# EAGLE board pcb_sensor (EAGLE 9.6.2)
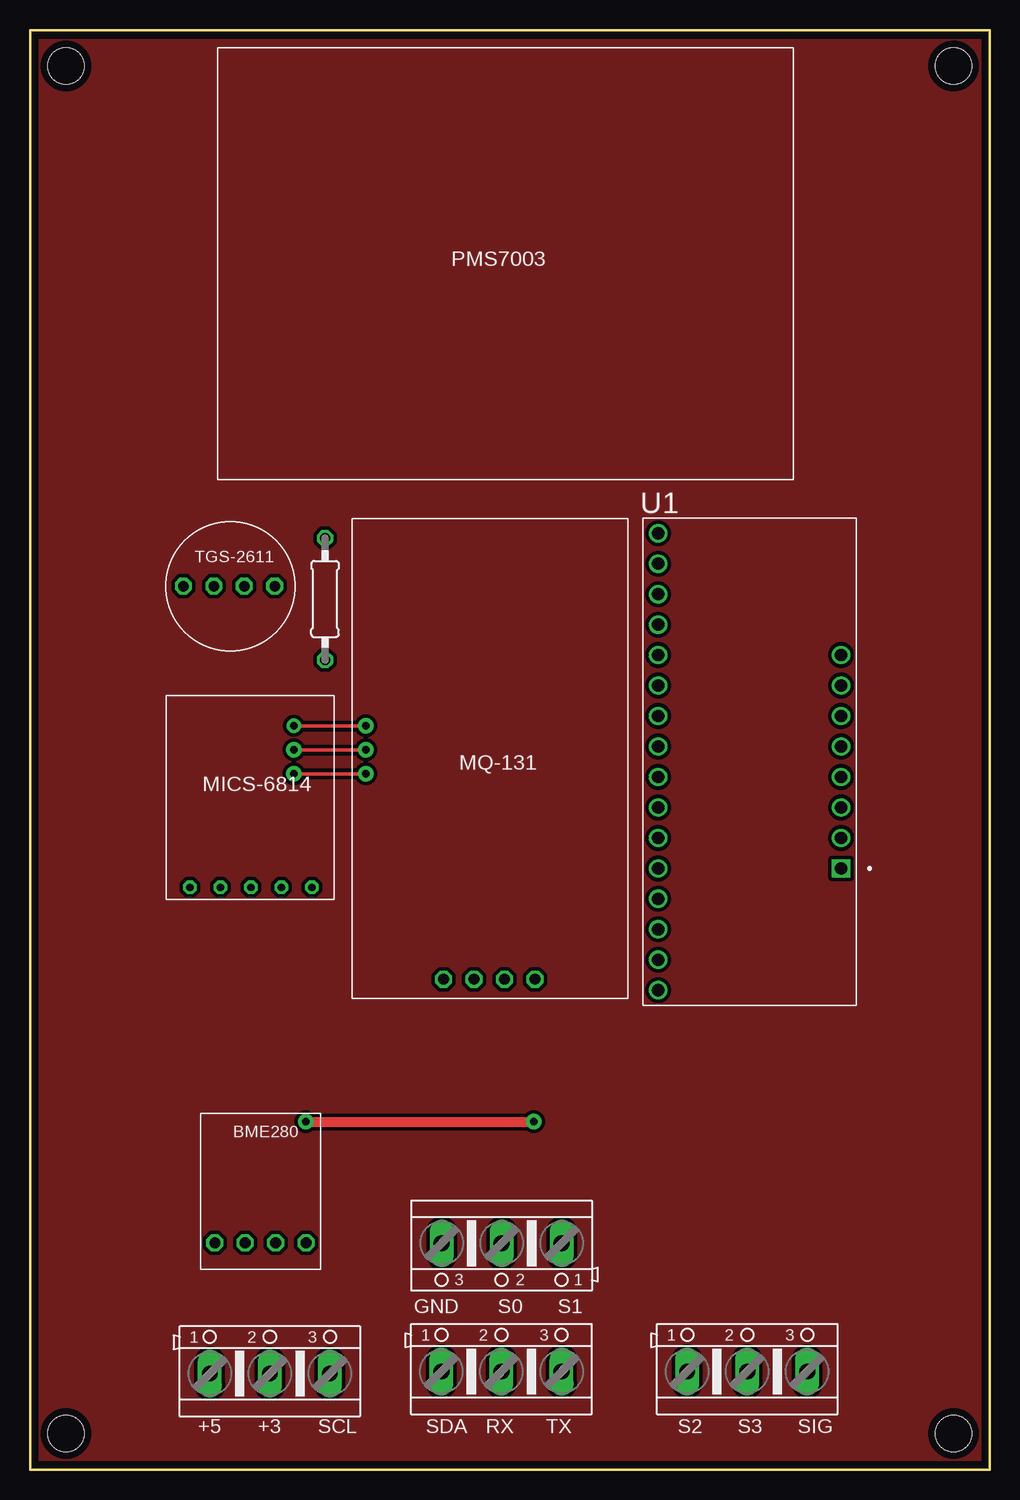
[diagram p0: board, top side]
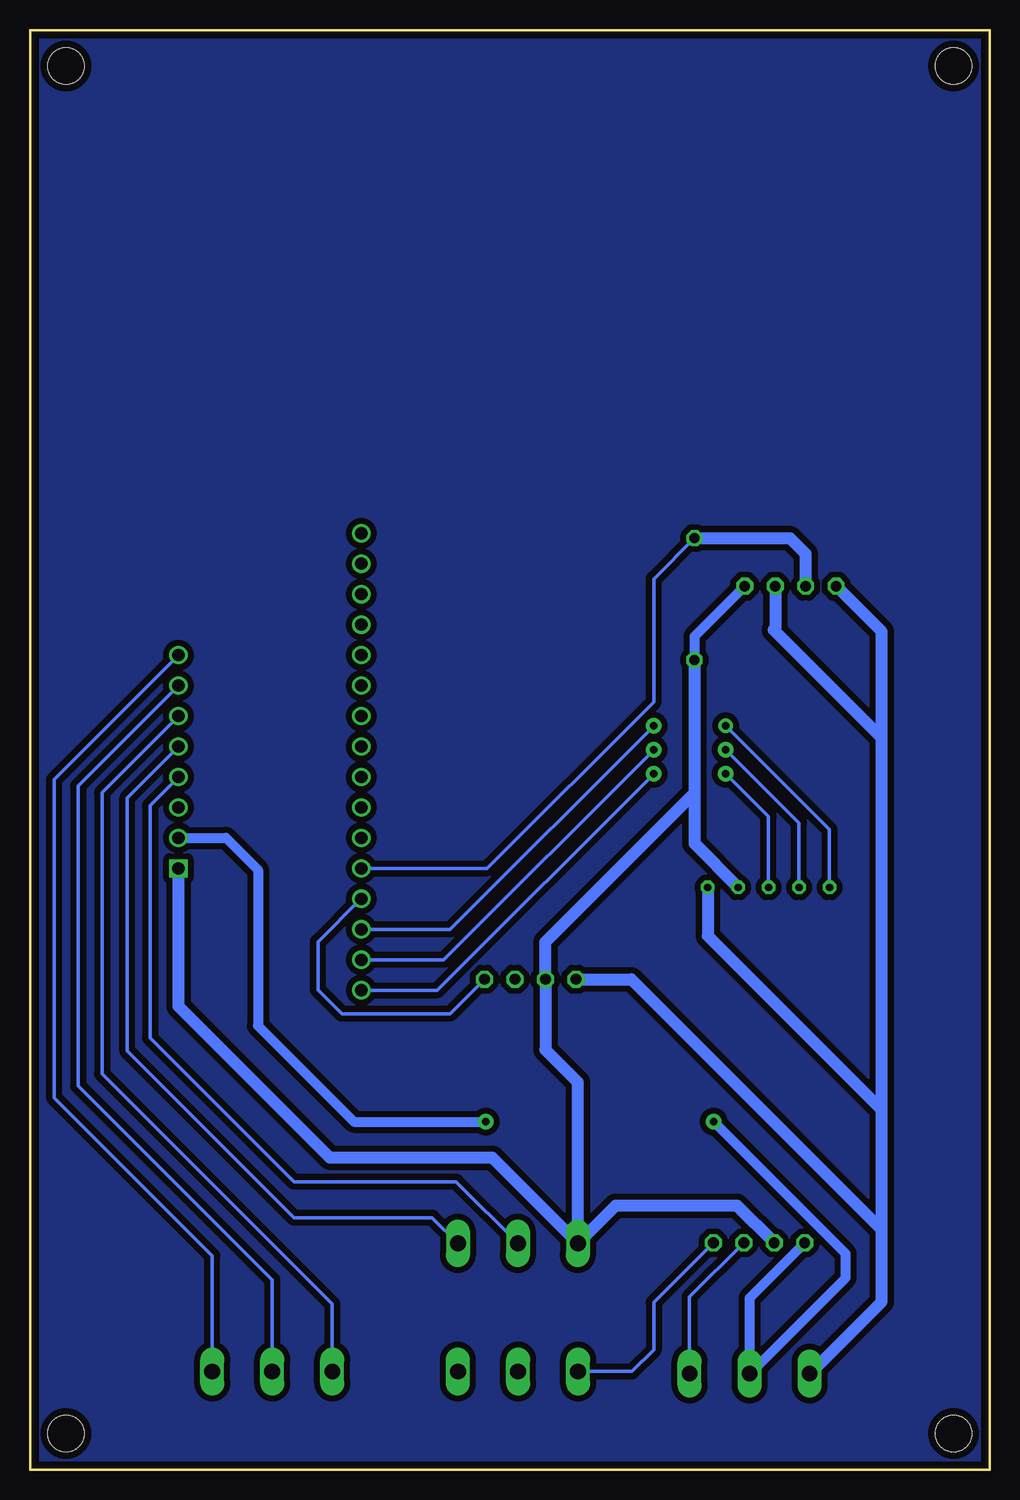
[diagram p1: board, bottom side, seen from below]

Size 80 x 120 mm. Coordinates in mm from the lower left corner, seen from the top.
Outline: 0,120 80,120 80,0 0,0 0,120
Copper layers (1*16): Top 0.035mm / dielectric 1.5mm / Bottom 0.035mm
Design rules "default *": minimum track width 6mil, minimum drill 0.35mm, track to track 12mil, track to pad 12mil, pad to pad 12mil, via to via 12mil, smd to smd 12mil, copper to edge 24mil, drill to drill 6mil, minimum pad ring 10mil, minimum via ring 8mil, stop-mask expansion 4mil, vias tented up to drill 0mil, thermal gap 10mil
Holes 3 mm at 3,3 77,3 77,117 3,117

## Footprints (pad centres in the part's own frame; a part is rotated, then mirrored left to right if it is on the bottom)
0207/10 = drill 0.813 octagon: 1 -5.08,0; 2 5.08,0
MODULE_BOB-09056 = drill 1.02: JP1-1 -7.62,-19.05; JP1-2 -7.62,-16.51; JP1-3 -7.62,-13.97; JP1-4 -7.62,-11.43; JP1-5 -7.62,-8.89; JP1-6 -7.62,-6.35; JP1-7 -7.62,-3.81; JP1-8 -7.62,-1.27; JP1-9 -7.62,1.27; JP1-10 -7.62,3.81; JP1-11 -7.62,6.35; JP1-12 -7.62,8.89; JP1-13 -7.62,11.43; JP1-14 -7.62,13.97; JP1-15 -7.62,16.51; JP1-16 -7.62,19.05; JP3-2 7.62,-6.35; JP3-3 7.62,-3.81; JP3-4 7.62,-1.27; JP3-5 7.62,1.27; JP3-6 7.62,3.81; JP3-7 7.62,6.35; JP3-8 7.62,8.89 | drill 1.02 square: JP3-1 7.62,-8.89
BME280 = drill 0.9 octagon: GND 2.54,0; SCL 5.08,0; SDA 7.62,0; VIN 0,0
MICS-6814 = drill 0.6 octagon: 5V 10.16,0; CO 0,0; GND 7.62,0; NH3 2.54,0; NO2 5.08,0
MQ-131 = drill 0.9 octagon: A0 15.26,1.6; D0 12.72,1.6; GND 10.18,1.6; VCC 7.64,1.6
TGS-2611 = drill 0.9 octagon: 1 8.7,4; 2 3.62,4; 3 1.08,4; 4 6.16,4
AK500/3 = drill 1.321 long: 1 -5.004,0; 2 0,0; 3 5.004,0

## Placement (x,y rotation side)
R1  10k  [0207/10]  24.6,72.56 270 top
U1  BOB-09056  [MODULE_BOB-09056]  60,59 0 top
U$1  BME280  [BME280]  15.41,18.9 0 top
U$2  MICS-6814  [MICS-6814]  13.34,48.53 0 top
U$3  MQ-131MQ-131  [MQ-131]  26.85,39.27 0 top
U$4  TGS-2611  [TGS-2611]  11.71,69.63 0 top
U$5  PMS7003  [PMS7003]  23.66,82.53 0 top
X1  [AK500/3]  20,8 0 top
X2  [AK500/3]  39.31,8.17 0 top
X3  [AK500/3]  59.8,8.17 0 top
X4  [AK500/3]  39.32,18.86 180 top

## Library data of the parts
R1 = rcl; SPICEPREFIX: R
U1 = Multiplexer; AVAILABILITY: In Stock; CHECK_PRICES: https://www.snapeda.com/parts/BOB-09056/SparkFun/view-part/?ref=eda; DESCRIPTION: 74HC4067 - Analog and Digital Switch Interface Evaluation Board; MF: SparkFun Electronics; MP: BOB-09056; PACKAGE: None; PRICE: None; SNAPEDA_LINK: https://www.snapeda.com/parts/BOB-09056/SparkFun/view-part/?ref=snap
U$1-U$5 = Sensor_Manual
X1-X4 = con-ptr500; OC_FARNELL: unknown; OC_NEWARK: unknown

## Nets
N$1: U1.JP1-1 U$2.NO2
N$2: R1.2 U1.JP3-1 U$1.GND U$2.GND U$3.GND U$4.1 X4.3
N$3: R1.1 U1.JP1-5 U$4.2
N$5: U1.JP1-3 U$2.CO
N$6: U1.JP1-2 U$2.NH3
N$7: U$1.SDA X2.1
N$8: U1.JP3-5 X4.1
N$9: U$2.5V U$3.VCC U$4.3 U$4.4 X1.1
N$10: U1.JP1-4 U$3.A0
N$11: U$1.SCL X1.3
N$12: U1.JP3-8 X3.3
N$13: U1.JP3-4 X4.2
N$14: U1.JP3-7 X3.2
N$15: U1.JP3-6 X3.1
N$16: U1.JP3-2 U$1.VIN X1.2

## Tracks (layer width: path | path; a pad name or v marks a point on that pad's centre or on a via)
GND
  pour Top: 0,120 80,120 80,0 0,0
  pour Bottom (isolate 0.508): 0,120 80,120 80,0 0,0
N$1  (via drill 0.61 pad 1.27)
  Top 0.305: v28,58 v22,58
  Bottom 0.305: U$2.NO2 18.42,54.42 v22,58 | U1.JP1-1 46.05,39.95 v28,58
N$2
  Bottom 0.813: U$4.1 24.6,69.44 R1.2
  Bottom 1.016: U$1.GND 21.05,22 31.18,22 X4.3 | R1.2 24.6,56.4 | 24.6,56.4 24.6,52.17 U$2.GND | 24.6,56.4 37.03,43.97 U$3.GND 37.03,35 34.32,32.29 X4.3 | U1.JP3-1 67.62,38.62 55,26 41.46,26 X4.3
N$3
  Bottom 0.305: U1.JP1-5 41.89,50.11 28,64 28,74.24 R1.1
  Bottom 1.016: U$4.2 15.33,76.33 16.64,77.64 R1.1
N$5  (via drill 0.61 pad 1.2, 0.61 pad 1.27)
  Top 0.305: v22,62 v28,62
  Bottom 0.305: U$2.CO 13.34,53.34 v22,62 | v28,62 44.97,45.03 U1.JP1-3
N$6  (via drill 0.61 pad 1.27)
  Top 0.305: v22,60 v28,60
  Bottom 0.305: U$2.NH3 15.88,53.88 v22,60 | U1.JP1-2 45.51,42.49 v28,60
N$7
  Bottom 0.305: X2.1 29.83,8.17 28,10 28,13.93 U$1.SDA
N$8
  Bottom 0.305: U1.JP3-5 71.89,56 71.89,34.89 58,21 46.46,21 X4.1
N$9
  Bottom 1.016: X1.1 9,14 9,20 | U$4.3 9,69.84 9,61 | 9,20 9,30 | 9,30 9,61 | U$4.4 17.87,70.13 18,70 9,61 | 9,20 18,29 29.87,40.87 U$3.VCC | U$2.5V 23.5,44.5 19.5,40.5 19,40 9,30
N$10
  Bottom 0.305: U$3.A0 44.98,38 54,38 56,40 56,44 52.43,47.57 U1.JP1-4
N$11
  Bottom 0.305: U$1.SCL 25,14.39 X1.3
N$12
  Bottom 0.305: U1.JP3-8 78,57.51 78,31 64.8,17.8 X3.3
N$13
  Bottom 0.305: U1.JP3-4 70,55.35 70,36 58,24 44.46,24 X4.2
N$14
  Bottom 0.305: U1.JP3-7 76,56.97 76,32 59.8,15.8 X3.2
N$15
  Bottom 0.305: U1.JP3-6 74,56.43 74,33 54.8,13.8 X3.1
N$16  (via drill 0.61 pad 1.27)
  Top 0.813: v23,29 v42,29
  Bottom 0.813: U1.JP3-2 63.65,52.65 61,50 61,37 53,29 v42,29 | U$1.VIN 20,14.31 X1.2 12,16 12,18 v23,29

## Text on the board
tPlace: GND | S0 | S1 | +5 | +3 | SCL | SDA | RX | TX | S2 | S3 | SIG